# EAGLE board ControlBoard_V1.0 (EAGLE 6.2)
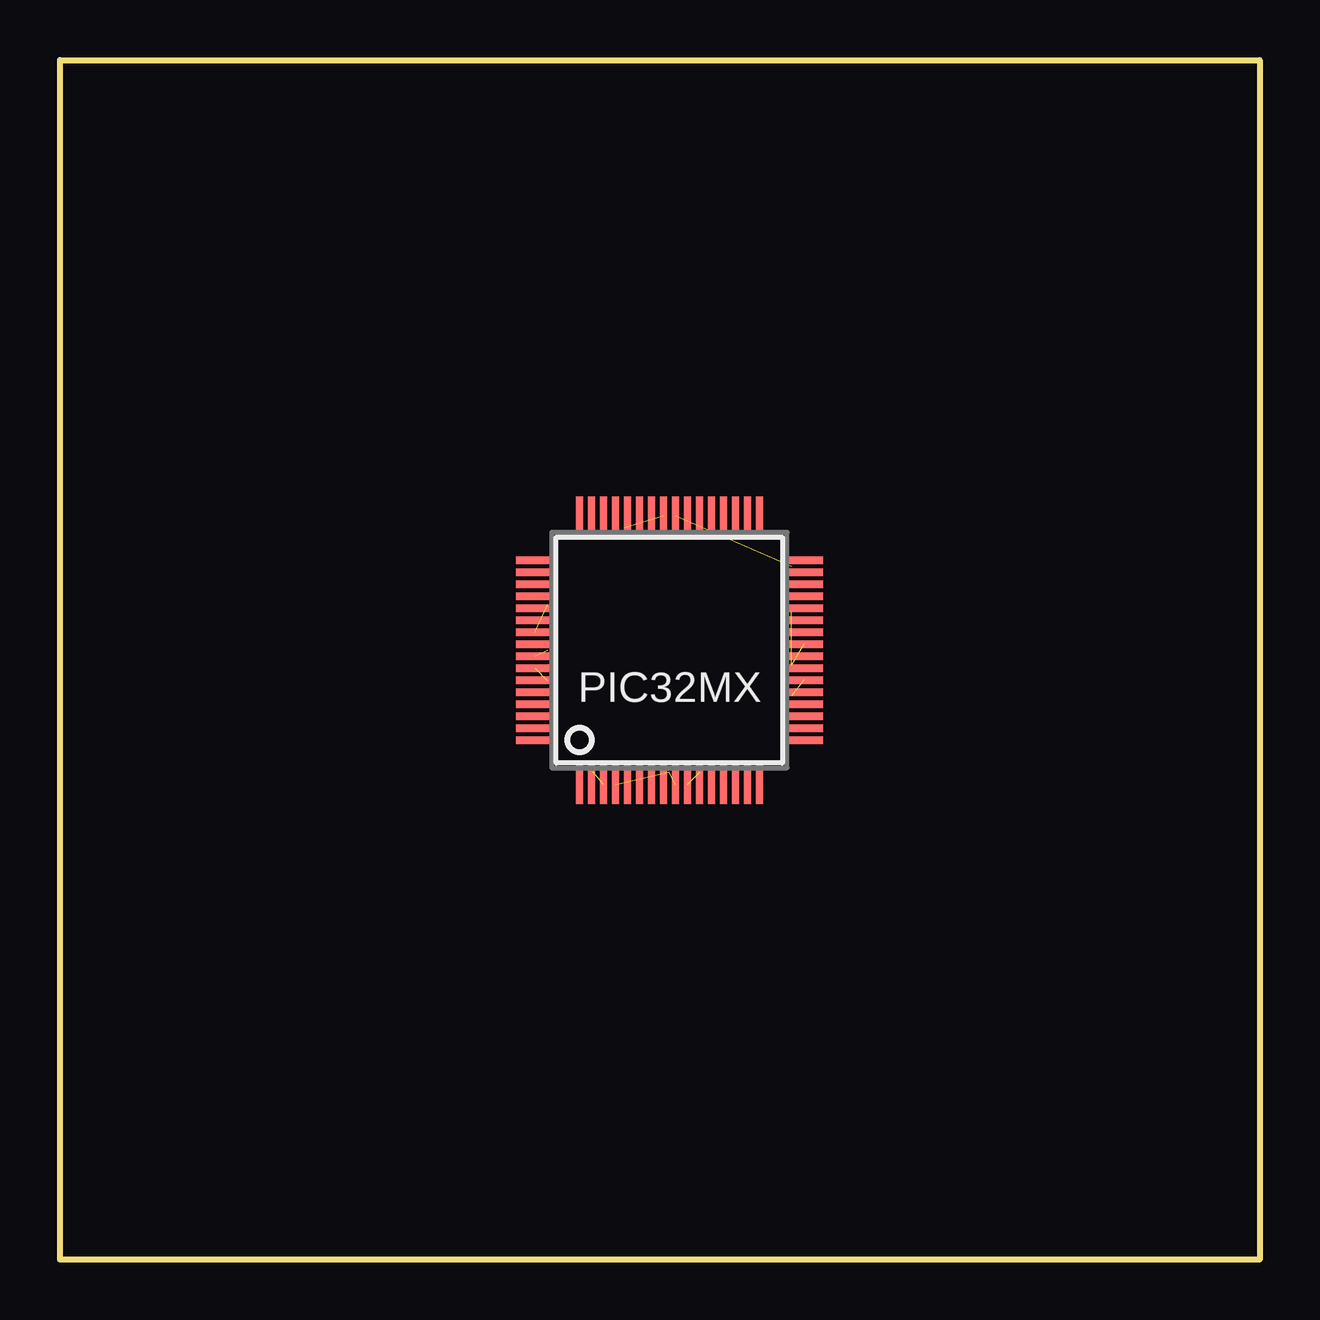
[diagram p0: board, top side]
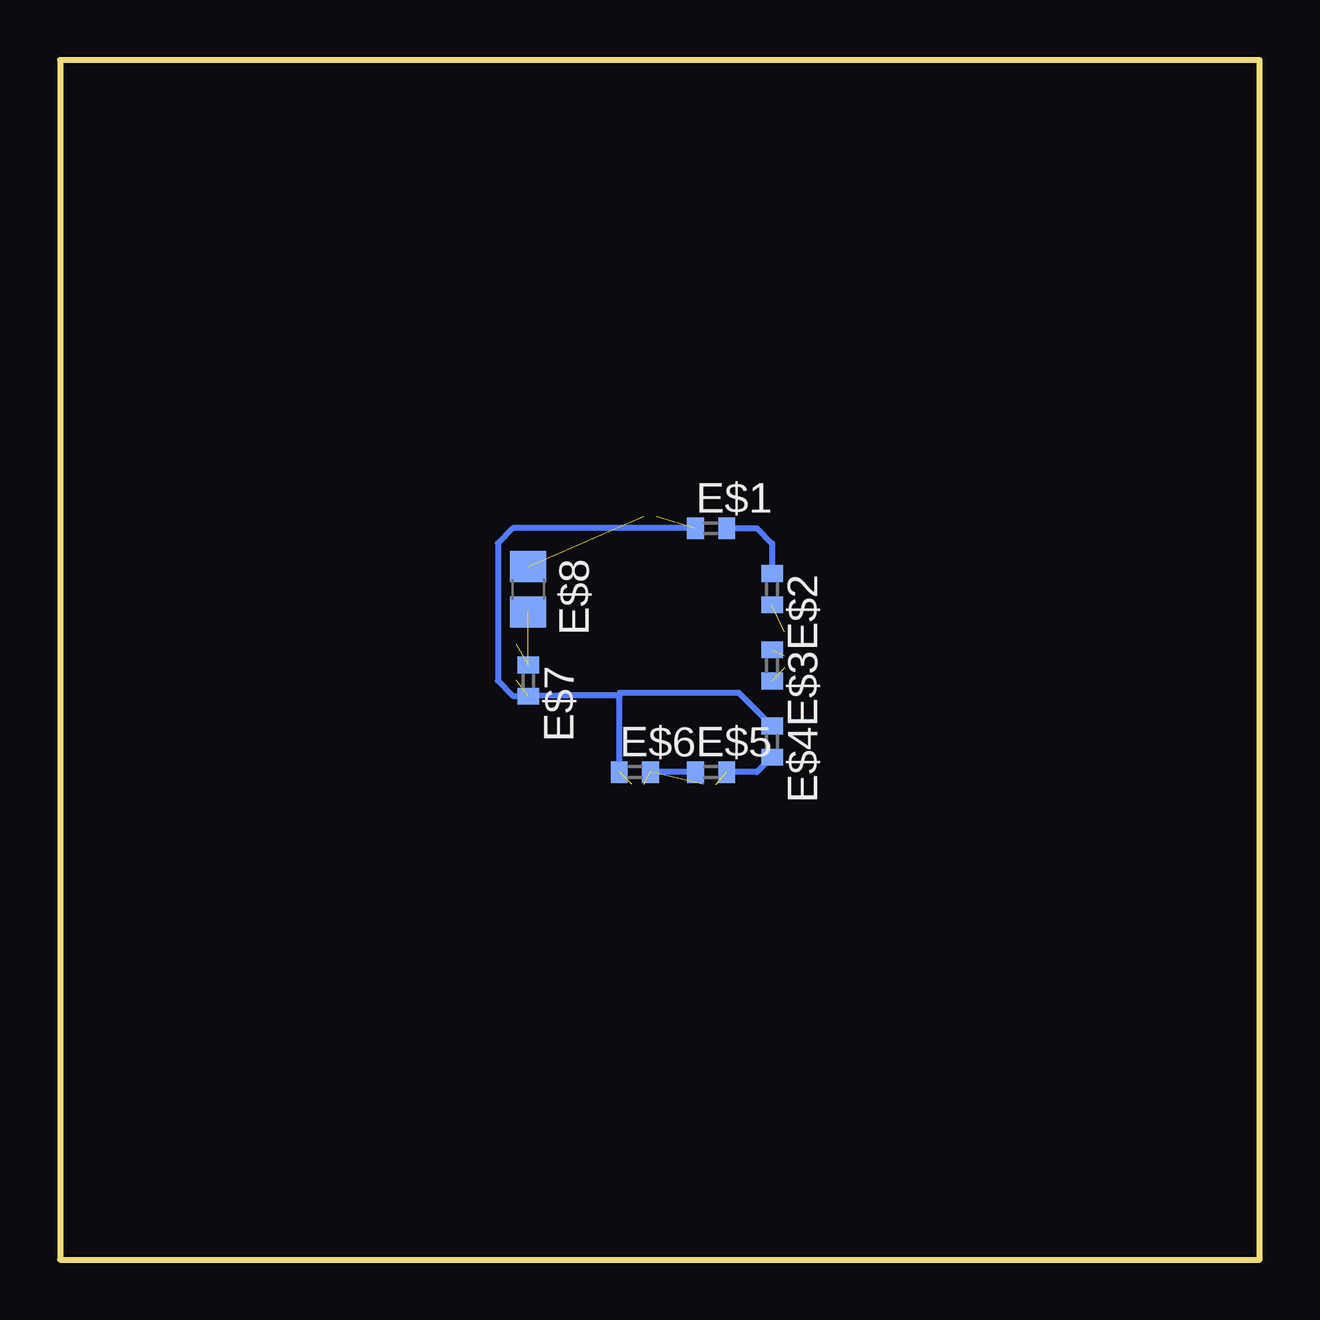
[diagram p1: board, bottom side, seen from below]

Size 50 x 50 mm. Coordinates in mm from the lower left corner, seen from the top.
Outline: 0,0 0,50 50,50 50,0 0,0
Copper layers (1*16): Top 0.035mm / dielectric 1.5mm / Bottom 0.035mm
Design rules: minimum track width 10mil, minimum drill 24mil, track to track 8mil, track to pad 8mil, pad to pad 8mil, via to via 8mil, smd to smd 8mil, copper to edge 40mil, drill to drill 8mil, minimum pad ring 10mil, minimum via ring 8mil, stop-mask expansion 4mil, vias tented up to drill 0mil, thermal gap 10mil

## Footprints (pad centres in the part's own frame; a part is rotated, then mirrored left to right if it is on the bottom)
C0402 = smd 0.7 x 0.9: 1 -0.65,0; 2 0.65,0
C0805 = smd 1.3 x 1.5: 1 -0.95,0; 2 0.95,0
SQFP-S-10X10-64 = smd 0.3 x 1.6: 1 -3.75,-5.6; 2 -3.25,-5.6; 3 -2.75,-5.6; 4 -2.25,-5.6; 5 -1.75,-5.6; 6 -1.25,-5.6; 7 -0.75,-5.6; 8 -0.25,-5.6; 9 0.25,-5.6; 10 0.75,-5.6; 11 1.25,-5.6; 12 1.75,-5.6; 13 2.25,-5.6; 14 2.75,-5.6; 15 3.25,-5.6; 16 3.75,-5.6; 33 3.75,5.6; 34 3.25,5.6; 35 2.75,5.6; 36 2.25,5.6; 37 1.75,5.6; 38 1.25,5.6; 39 0.75,5.6; 40 0.25,5.6; 41 -0.25,5.6; 42 -0.75,5.6; 43 -1.25,5.6; 44 -1.75,5.6; 45 -2.25,5.6; 46 -2.75,5.6; 47 -3.25,5.6; 48 -3.75,5.6 | smd 1.6 x 0.3: 17 5.6,-3.75; 18 5.6,-3.25; 19 5.6,-2.75; 20 5.6,-2.25; 21 5.6,-1.75; 22 5.6,-1.25; 23 5.6,-0.75; 24 5.6,-0.25; 25 5.6,0.25; 26 5.6,0.75; 27 5.6,1.25; 28 5.6,1.75; 29 5.6,2.25; 30 5.6,2.75; 31 5.6,3.25; 32 5.6,3.75; 49 -5.6,3.75; 50 -5.6,3.25; 51 -5.6,2.75; 52 -5.6,2.25; 53 -5.6,1.75; 54 -5.6,1.25; 55 -5.6,0.75; 56 -5.6,0.25; 57 -5.6,-0.25; 58 -5.6,-0.75; 59 -5.6,-1.25; 60 -5.6,-1.75; 61 -5.6,-2.25; 62 -5.6,-2.75; 63 -5.6,-3.25; 64 -5.6,-3.75

## Placement (x,y rotation side)
E$1  [C0402]  22.86,30.48 0 bottom
E$2  [C0402]  20.32,27.94 270 bottom
E$3  [C0402]  20.32,24.77 270 bottom
E$4  [C0402]  20.32,21.59 270 bottom
E$5  [C0402]  22.86,20.32 0 bottom
E$6  [C0402]  26.04,20.32 0 bottom
E$7  [C0402]  30.48,24.13 270 bottom
E$8  [C0805]  30.48,27.94 270 bottom
PIC32MX  [SQFP-S-10X10-64]  25.4,25.4 0 top

## Library data of the parts
E$1-E$8 PIC32MX = smd-ipc

## Nets
S$1: E$1.2 E$2.1
S$2: E$1.1 E$4.1 E$6.1 E$7.2 PIC32MX.10 PIC32MX.22 PIC32MX.41
S$3: E$7.1 E$8.2 PIC32MX.25
S$4: E$4.2 E$5.2 PIC32MX.3
S$5: E$5.1 E$6.2 PIC32MX.4 PIC32MX.9
S$6: E$8.1 PIC32MX.40
S$7: E$2.2 PIC32MX.55
S$8: E$3.1 PIC32MX.57
S$9: E$3.2 PIC32MX.58

## Tracks (layer width: path | path; a pad name or v marks a point on that pad's centre or on a via)
S$1
  Bottom 0.254: E$1.2 20.95,30.48 20.32,29.84 E$2.1
S$2  (3 unrouted)
  Bottom 0.254: E$4.1 21.7,23.62 26.67,23.62 26.67,23.51 | 26.67,23.51 29.24,23.51 E$7.2 30.5,23.5 31.11,23.5 31.75,24.13 31.75,29.84 31.11,30.48 E$1.1 | E$6.1 26.68,22.23 26.67,23.51
S$3  (2 unrouted)
S$4  (1 unrouted)
  Bottom 0.254: E$4.2 20.95,20.32 E$5.2
S$5  (2 unrouted)
  Bottom 0.254: E$5.1 E$6.2
S$6  (1 unrouted)
S$7  (1 unrouted)
S$8  (1 unrouted)
S$9  (1 unrouted)